# EAGLE board DoorC (EAGLE 7.6.0)
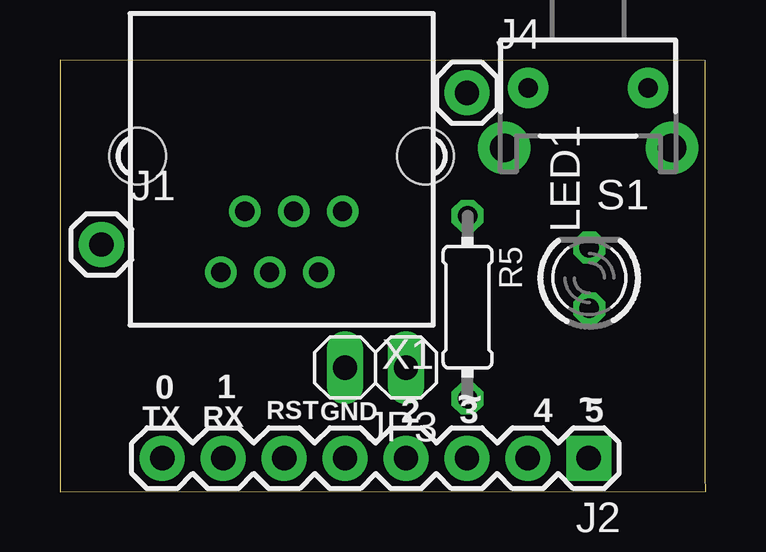
[diagram p0: board, top side]
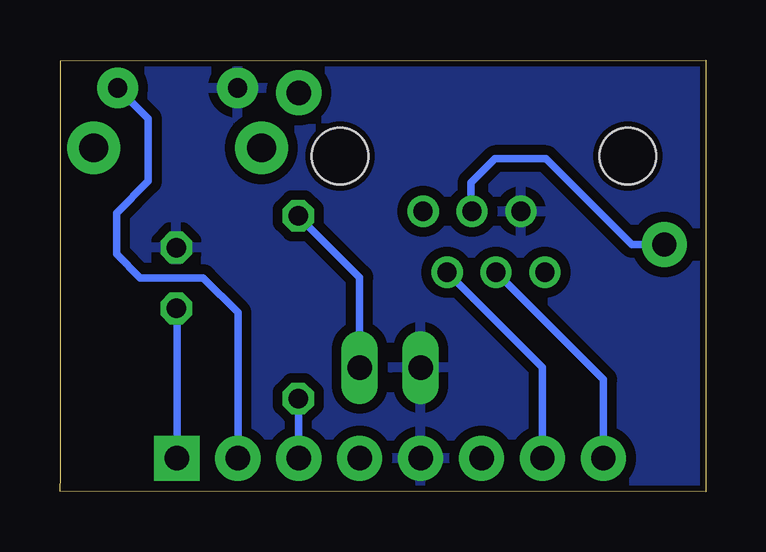
[diagram p1: board, bottom side, seen from below]

Size 26.92 x 18.01 mm. Coordinates in mm from the lower left corner, seen from the top.
Outline: 0,0 26.92,0.02 26.9,0.66 26.9,17.98 0,18.01 0,0
Copper layers (1*16): Top 0.035mm / dielectric 1.5mm / Bottom 0.035mm
Design rules "ITEADstudio_DRC *": minimum track width 6mil, minimum drill 12mil, track to track 16mil, track to pad 12mil, pad to pad 6mil, via to via 6mil, smd to smd 0mil, copper to edge 10mil, drill to drill 10mil, minimum pad ring 10mil, minimum via ring 6mil, stop-mask expansion 2mil, vias tented up to drill 100mil, thermal gap 15mil
Net classes: 1 power: width 0.381 mm, clearance 0.254 mm

## Footprints (pad centres in the part's own frame; a part is rotated, then mirrored left to right if it is on the bottom)
1X01 = drill 1.016 pad 1.88: 1 0,0
1X08 = drill 1.016 pad 1.88 square: 1 0,0 | drill 1.016 pad 1.88: 2 2.54,0; 3 5.08,0; 4 7.62,0; 5 10.16,0; 6 12.7,0; 7 15.24,0; 8 17.78,0
1X02 = drill 1.016 long: 1 -1.27,0; 2 1.27,0
LED3MM = drill 0.813 octagon: A -1.27,0; K 1.27,0
0204/7 = drill 0.813 octagon: 1 -3.81,0; 2 3.81,0
TACTILE-PTH-SIDEEZ = drill 0.8 pad 1.7: 1 -2.5,0; 2 2.5,0 | drill 1.2 pad 2.2: ANCHOR1 -3.5,2.5; ANCHOR2 3.5,2.5
YH-55-10 = drill 0.8 pad 1.3: 1 -2.54,2.3; 2 -1.54,4.84; 3 -0.5,2.3; 4 0.5,4.84; 5 1.54,2.3; 6 2.54,4.84 | hole 2.36: -6,0; 6,0

## Placement (x,y rotation side)
J1  [1X01]  1.73,10.31 0 top
J2  [1X08]  22.05,1.4 180 top
J4  [1X01]  16.97,16.64 0 top
JP3  [1X02]  13.16,5.18 180 top
LED1  [LED3MM]  22.07,8.92 90 top
R5  [0204/7]  16.99,7.7 270 top
S1  SWITCH-MOMENTARY-2SIDE_EZ  [TACTILE-PTH-SIDEEZ]  22.02,16.84 180 top
X1  YH-55-10  [YH-55-10]  9.25,14 180 top

## Library data of the parts
J1 J4 = SparkFun-Connectors
J2 = SparkFun-Connectors; PROD_ID: CONN-08438
JP3 = pinhead
LED1 = led
R5 = rcl
S1 = SparkFun-Electromechanical
X1 = con-wenzhou-yihua; OC_FARNELL: unknown; OC_NEWARK: unknown

## Nets
AGND [power]: JP3.2
GND [power]: J2.5 LED1.K S1.2 X1.5
N$1: J2.2 S1.1
N$2: JP3.1 R5.1
N$3: J2.1 LED1.A
N$4: J2.8 X1.4
N$6: J2.7 X1.2
N$10: J2.3 R5.2
VIN: J1.1 X1.3

## Tracks (layer width: path | path; a pad name or v marks a point on that pad's centre or on a via)
AGND
  pour Bottom: 3,17.91 26.87,17.78 26.95,0.18 0.23,0.05 0.18,17.86
GND
  pour Bottom: 0.13,17.81 26.87,17.86 26.97,0.13 0.23,0.08
N$1
  Bottom 0.305: J2.2 19.51,7.47 20.95,8.91 23.57,8.91 24.56,9.91 24.56,11.63 23.24,12.95 23.24,15.56 S1.1
N$2
  Bottom 0.305: JP3.1 14.43,8.94 R5.1
N$3
  Bottom 0.305: J2.1 22.05,7.62 LED1.A
N$4
  Bottom 0.305: J2.8 4.27,4.68 X1.4
N$6
  Bottom 0.305: J2.7 6.81,5.18 X1.2
N$10
  Bottom 0.305: J2.3 16.97,3.86 R5.2
VIN
  Bottom 0.305: J1.1 3.07,10.31 6.65,13.89 8.79,13.89 9.78,12.9 9.78,11.73 X1.3

## Text on the board
_tsilk: 0 | 1 | TX | RX | RST | GND | 2 | ~ | 3 | 4 | ~ | 5